# Allegro board P1_V3_PCB.brd
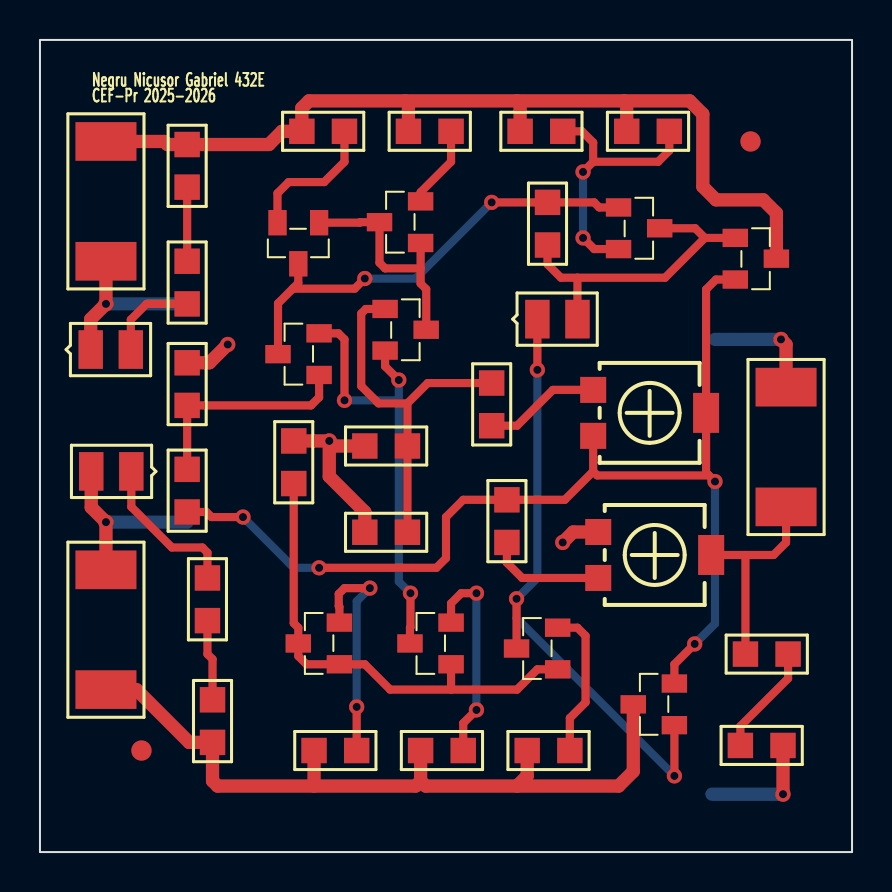
[diagram p0: board, top side]
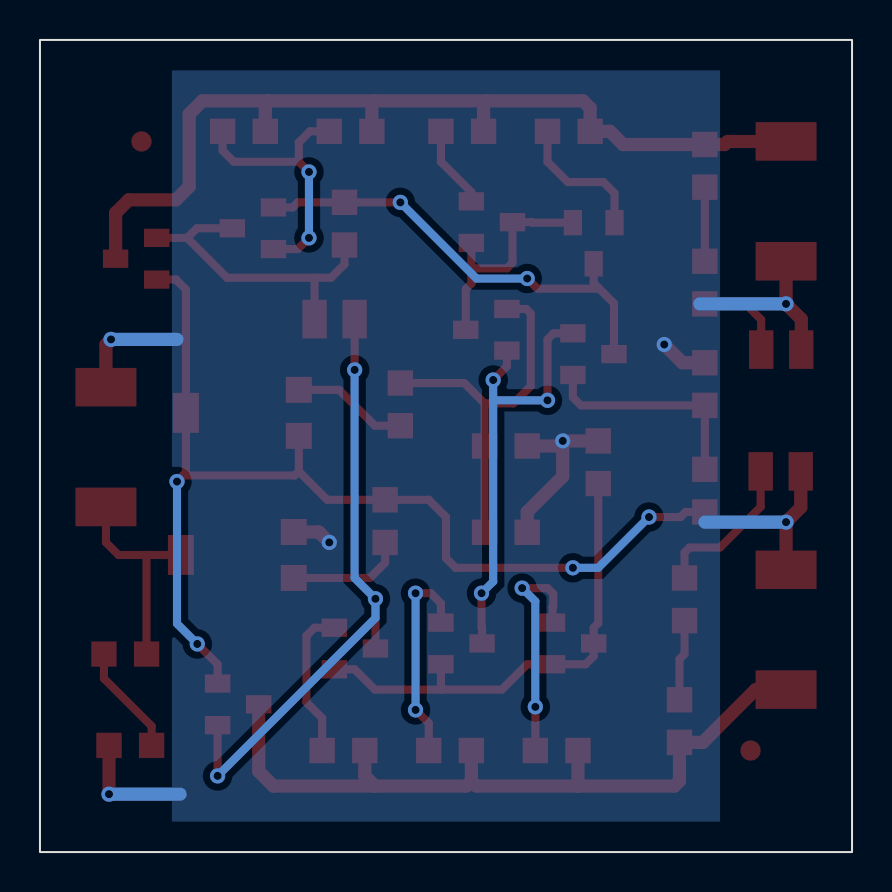
[diagram p1: board, bottom side, seen from below]

Outline 40.64 x 40.64 mm; copper layers: TOP, BOTTOM. Coordinates in mm from the lower left corner of the outline.
Outline path: rectangle 0,0 40.64,40.64

## Design rules (mm)
nets with their own width: min track width 0.406; nets N14788 N14794 N14832 N14838 N14844 N14946 N14958 N15008 N15096 N15146 N15224 N15346 N15380 N15522 N15548 N15660 N15770 N15776 N15838 N15844 N15964 N17257 OUT
nets with their own width: min track width 0.66; nets GND V+ V-

## Placement (name value [footprint] x y rotation side)
C1  33n  [SMC0805]  16.26 20.32 0 top
C2  33n  [SMC0805]  16.26 16 0 top
C3  4.7p  [SMC0805]  25.4 32.51 270 top
C4  10u  [SMC0805]  31.5 36.07 180 top
D1  LED  [SMD0805]  2.54 25.15 0 top
D2  LED  [SMD0805]  4.57 19.05 180 top
J1  CON2  [SMR2512]  3.3 35.56 270 top
J2  CON2  [SMR2512]  3.3 8.13 90 top
J3  CON2  [SMR2512]  37.34 17.27 90 top
NOREF  -  []  0 0 0 top
NOREF#2  -  []  40.64 0 90 top
NOREF#3  -  [unnamed#2]  35.56 35.56 0 top
NOREF#4  -  [unnamed#2]  5.08 5.08 0 top
Q1  QBC846B  [TO236AB]  14.99 9.4 0 top
Q2  QBC846B  [TO236AB]  20.57 9.4 0 top
Q3  QBC856B  [TO236AB]  13.97 31.5 90 top
Q4  QBC856B  [TO236AB]  19.05 30.48 0 top
Q5  QBC846B  [TO236AB]  13.97 23.88 0 top
Q6  QBC846B  [TO236AB]  17.27 27.18 180 top
Q7  QBC856B  [TO236AB]  28.96 32.26 180 top
Q8  QBC846B  [TO236AB]  25.91 9.14 0 top
Q9  QBC846B  [TO236AB]  34.8 30.73 180 top
Q10  QBC856B  [TO236AB]  31.75 6.35 0 top
R1  8.2k  [SMR0805]  12.7 20.57 270 top
R2  10k  [SMR0805]  7.37 22.35 90 top
R3  10k  [SMR0805]  7.37 17.02 90 top
R4  100  [SMR0805]  13.72 5.08 0 top
R5  51  [SMR0805]  19.05 5.08 0 top
R6  51  [SMR0805]  15.24 36.07 180 top
R7  51  [SMR0805]  20.57 36.07 180 top
R8  51  [SMR0805]  26.16 36.07 180 top
R9  22  [SMR0805]  24.38 5.08 0 top
R10  100  [SMR0805]  22.61 21.34 90 top
R11  22k  [SMR0805]  23.37 15.49 90 top
R12  8.2k  [SMR0805]  35.31 9.91 0 top
R13  8.2k  [SMR0805]  35.05 5.33 0 top
R14  100  [TS53YL]  27.69 20.83 180 top
R15  10k  [TS53YL]  27.94 13.72 180 top
R16  220  [SMR0805]  7.37 27.43 90 top
R17  220  [SMR0805]  7.37 33.27 90 top
R18  220  [SMR0805]  8.64 7.62 270 top
R19  220  [SMR0805]  8.38 13.72 270 top
U1  1N4148  [SMD0805]  24.89 26.67 0 top

## Library data of the parts
C1-C4 = c
D1 D2 = LED_1
J1-J3 = CON2
Q1 Q2 Q5 Q6 Q8 Q9 = QBC846B_0
Q3 Q4 Q7 Q10 = QBC856B_0
R1-R13 R16-R19 = r
R14 R15 = POT
U1 = 1N4148_2

## Footprints (pads in the part's own frame, mm; a bottom-side part is the same pattern mirrored in y, then rotated)
SMC0805
  rect 1.27x1.27 smd: 1(0,0) 2(2.134,0)
SMD0805
  rect 1.219x1.93 smd: A(2.007,0) C(0,0)
SMR0805
  rect 1.27x1.27 smd: 1(0,0) 2(2.134,0)
SMR2512
  rect 1.93x3.048 smd: 1(0,0) 2(5.994,0)
TO236AB
  rect 1.27x0.914 smd: 1(0,0) 2(0,2.083) 3(-2.057,1.041)
TS53YL
  rect 1.3x1.3 smd: 1(0,0) 3(0,-2.3)
  rect 1.3x1.999 smd: 2(-5.65,-1.15)
unnamed#2
  round 1.016 smd: (0,0)

## Nets
GND: C1.1 C2.1 D1.C(2) D2.A J1.2 J2.2 J3.2 R1.1 R2.2 R13.2 R15.3
OUT: J3.1 R12.1 R15.2(T)
V+: C4.2 J1.1 Q9.3 R6.2 R7.2 R8.2 R17.2
V-: J2.1 Q10.3 R4.1 R5.1 R9.1 R18.2
N14788: D1.A R16.1
N14794: R16.2 R17.1
N14832: Q3.2(E) R6.1
N14838: Q4.2(E) R7.1
N14844: C4.1 Q7.2(E) R8.1
N14946: Q3.1 Q4.1 Q4.3 Q6.3
N14958: C3.1 Q3.3 Q5.3 Q7.1
N15008: C3.2 Q7.3 Q9.1 U1.A
N15096: Q9.2(E) Q10.2(E) R3.1 R11.2 R14.1 R14.2(T)
N15146: R11.1 R15.1
N15224: Q5.1 R2.1 R3.2
N15346: C1.2 C2.2 Q6.1 R10.2
N15380: Q2.3 Q5.2(E) Q6.2(E)
N15522: R12.2 R13.1
N15548: Q1.1 Q1.3 Q2.1 Q8.1 R1.2
N15660: Q8.3 Q10.1 U1.C
N15770: Q1.2(E) R4.2
N15776: Q2.2(E) R5.2
N15838: Q8.2(E) R9.2
N15844: D2.C(2) R19.1
N15964: R18.1 R19.2
N17257: R10.1 R14.3

## Via types
v1: diameter 0.762, hole 0.406, TOP to BOTTOM, 25 vias

## Routing (per net, layer and track width the routed paths; a pad name or vN(x,y) marks a point on that pad's centre or on a via; arc(x,y) is an arc through that point)
GND: length 43.5
  TOP w0.66: R13.2 v1(37.19,2.9) ; J3.2 37.34,25.4 v1(37.08,25.65) ; J1.2 v1(3.3,27.43) 2.54,26.67 D1.C ; v1(14.48,20.57) 14.48,18.8 16.26,17.02 C2.1 ; v1(14.48,20.57) 14.73,20.32 C1.1 ; v1(14.48,20.57) R1.1 ; J2.2 v1(3.3,16.51) 2.57,17.25 D2.A ; R15.3 26.68,16.02 v1(26.16,15.49) ; v1(9.4,25.4) 8.48,24.49 R2.2
  BOTTOM w0.66: v1(3.3,27.43) 7.62,27.43 ; v1(37.08,25.65) 33.78,25.65 ; v1(37.19,2.9) 33.63,2.9 ; v1(3.3,16.51) 7.37,16.51
OUT: length 10.7
  TOP w0.406: R15.2 35.31,14.87 ; 35.31,14.87 R12.1 ; 35.31,14.87 36.71,14.87 37.34,15.49 J3.1
V+: length 46.7
  TOP w0.66: R8.2 24.03,37.44 23.88,37.59 ; 23.88,37.59 29.24,37.59 ; 23.88,37.59 18.29,37.59 ; 29.24,37.59 29.36,37.47 C4.2 ; 29.24,37.59 32.51,37.59 33.17,36.93 33.17,33.3 33.83,32.64 36.2,32.64 36.86,31.98 Q9.3 ; J1.1 6.22,35.56 6.38,35.41 R17.2 11.46,35.41 12.12,36.07 R6.2 13.11,37.24 13.46,37.59 18.29,37.59 ; 18.29,37.59 18.44,37.44 R7.2
V-: length 38.7
  TOP w0.66: 19.05,3.56 18.8,3.3 13.72,3.3 ; 19.05,3.56 R5.1 ; 19.05,3.56 19.3,3.3 23.88,3.3 ; 13.72,3.3 8.89,3.3 8.64,3.56 R18.2 7.47,5.49 4.83,8.13 J2.1 ; 13.72,3.3 R4.1 ; R9.1 24.38,3.81 23.88,3.3 ; 23.88,3.3 28.96,3.3 29.69,4.04 Q10.3
N14788: length 4.6
  TOP w0.406: R16.1 5.33,27.43 4.55,26.64 D1.A
N14794: length 3.7
  TOP w0.406: R17.1 R16.2
N14832: length 7
  TOP w0.406: R6.1 15.24,34.54 14.22,33.53 12.45,33.53 11.89,32.97 Q3.2
N14838: length 4.1
  TOP w0.406: Q4.2 19.05,33.02 20.57,34.54 R7.1
N14844: length 13.8
  TOP w0.406: v1(27.18,30.73) 27.74,30.18 Q7.2 ; 27.69,34.54 27.69,35.51 27.13,36.07 R8.1 ; 27.69,34.54 30.94,34.54 31.5,35.1 C4.1 ; 27.69,34.54 v1(27.18,34.04)
  BOTTOM w0.406: v1(27.18,34.04) v1(27.18,30.73)
N14946: length 11.7
  TOP w0.406: 19.05,29.21 Q4.1 ; 19.05,29.21 17.27,29.21 16.99,29.49 Q4.3 16.03,31.52 16,31.5 Q3.1 ; 19.05,29.21 19.05,28.45 19.33,28.17 Q6.3
N14958: length 23.1
  TOP w0.406: v1(16.26,28.7) 15.75,28.19 12.7,28.19 12.67,28.22 ; Q3.3 12.93,28.47 12.67,28.22 ; 12.67,28.22 11.91,27.46 Q5.3 ; Q7.1 27.99,32.26 27.74,32.51 C3.1 v1(22.61,32.51)
  BOTTOM w0.406: v1(22.61,32.51) 18.8,28.7 v1(16.26,28.7)
N15008: length 16
  TOP w0.406: 33.27,30.73 32.79,31.22 Q7.3 ; 33.27,30.73 31.28,28.74 26.9,28.74 ; 33.27,30.73 Q9.1 ; C3.2 25.4,29.41 26.07,28.74 26.9,28.74 ; 26.9,28.74 U1.A
N15096: length 54.8
  TOP w0.406: Q10.2 31.75,9.4 v1(32.77,10.41) ; 27.69,19.05 R14.1 ; 27.69,19.05 27.89,18.85 33.48,18.85 ; 27.69,19.05 26.26,17.63 R11.2 21.18,17.63 20.32,16.76 20.32,14.71 19.84,14.22 v1(13.97,14.22) ; Q9.2 33.83,28.65 33.34,28.15 R14.2 33.34,18.99 33.48,18.85 ; R3.1 8.33,17.02 8.59,16.76 v1(10.16,16.76) ; 33.48,18.85 v1(33.78,18.54)
  BOTTOM w0.406: v1(10.16,16.76) 12.7,14.22 v1(13.97,14.22) ; v1(32.77,10.41) 33.78,11.43 v1(33.78,18.54)
N15146: length 5.9
  TOP w0.406: R15.1 24.13,13.72 23.37,14.48 R11.1
N15224: length 11.1
  TOP w0.406: R3.2 R2.1 13.56,22.35 13.97,22.76 Q5.1
N15346: length 18.7
  TOP w0.406: 18.39,22.45 16.94,22.45 16.08,23.32 16.08,26.95 16.31,27.18 Q6.1 ; 18.39,22.45 C1.2 C2.2 ; 18.39,22.45 19.41,23.47 R10.2
N15380: length 22.4
  TOP w0.406: Q5.2 14.94,25.96 15.24,25.65 v1(15.24,22.61) ; Q6.2 17.27,24.31 v1(17.96,23.62) ; Q2.3 18.52,11.23 18.54,11.25 v1(18.54,12.95)
  BOTTOM w0.406: v1(18.54,12.95) 17.96,13.54 17.96,22.61 ; 17.96,22.61 v1(15.24,22.61) ; 17.96,22.61 v1(17.96,23.62)
N15522: length 5.6
  TOP w0.406: R12.2 37.44,8.69 35.05,6.3 R13.1
N15548: length 24.1
  TOP w0.406: Q2.1 20.57,8.13 ; 20.57,8.13 17.53,8.13 16.26,9.4 Q1.1 13.34,9.4 12.93,9.8 Q1.3 12.93,11.23 12.7,11.46 R1.2 ; 20.57,8.13 23.88,8.13 24.89,9.14 Q8.1
N15660: length 31.6
  TOP w0.406: Q8.3 v1(23.85,12.67) ; v1(31.75,3.81) Q10.1 ; U1.C v1(24.89,24.13)
  BOTTOM w0.406: v1(31.75,3.81) 23.85,11.71 v1(23.85,12.67) 24.89,13.72 v1(24.89,24.13)
N15770: length 11.5
  TOP w0.406: Q1.2 14.99,12.27 14.95,12.3 14.95,12.92 15.24,13.21 v1(16.51,13.21) ; R4.2 v1(15.85,7.26)
  BOTTOM w0.406: v1(15.85,7.26) 15.85,12.55 v1(16.51,13.21)
N15776: length 10.6
  TOP w0.406: Q2.2 20.57,12.45 21.08,12.95 v1(21.84,12.95) ; R5.2 21.18,6.45 v1(21.84,7.11)
  BOTTOM w0.406: v1(21.84,7.11) v1(21.84,12.95)
N15838: length 7.6
  TOP w0.406: R9.2 26.52,6.71 27.3,7.49 27.3,10.82 26.9,11.23 Q8.2
N15844: length 7.8
  TOP w0.406: D2.C 4.57,17.27 6.6,15.24 8.13,15.24 8.38,14.99 R19.1
N15964: length 4.1
  TOP w0.406: R19.2 8.38,9.91 8.64,9.65 R18.1
N17257: length 5.8
  TOP w0.406: R10.1 23.88,21.34 25.67,23.13 R14.3

## Copper pours and planes (outline as drawn; the poured copper is in the pictures)
GND on BOTTOM: 6.6,39.12 6.6,1.52 34.04,1.52 34.04,39.12

## Text on the board
Ref Des/Silkscreen Top: Negru Nicusor Gabriel 432E | CEF-Pr 2025-2026
XSECTION_CHART: *  SURFACE | L1 TOP CONDUCTOR | *  DIELECTRIC | L2 BOTTOM CONDUCTOR | DESIGN CROSS SECTION CHART | ___________________________ | TOTAL THICKNESS 64 MIL | 1-2
DIMENSION: FIGURE | FINISHED_SIZE | 16.0 | DRILL CHART: TOP to BOTTOM | ALL UNITS ARE IN MILS | PLATED | QTY | 25
